# Altium PCB bottom_board_rev10_2.PcbDoc
Units mm, origin at the board's own origin, x right, y up, seen from the top; angles counter-clockwise.
Board outline 109 x 70 mm, 4 copper layers (Top Layer, +12V, -12V, Bottom Layer), stack 0.603 mm thick; 60 components, 46 nets, 194 pads, 56 vias.
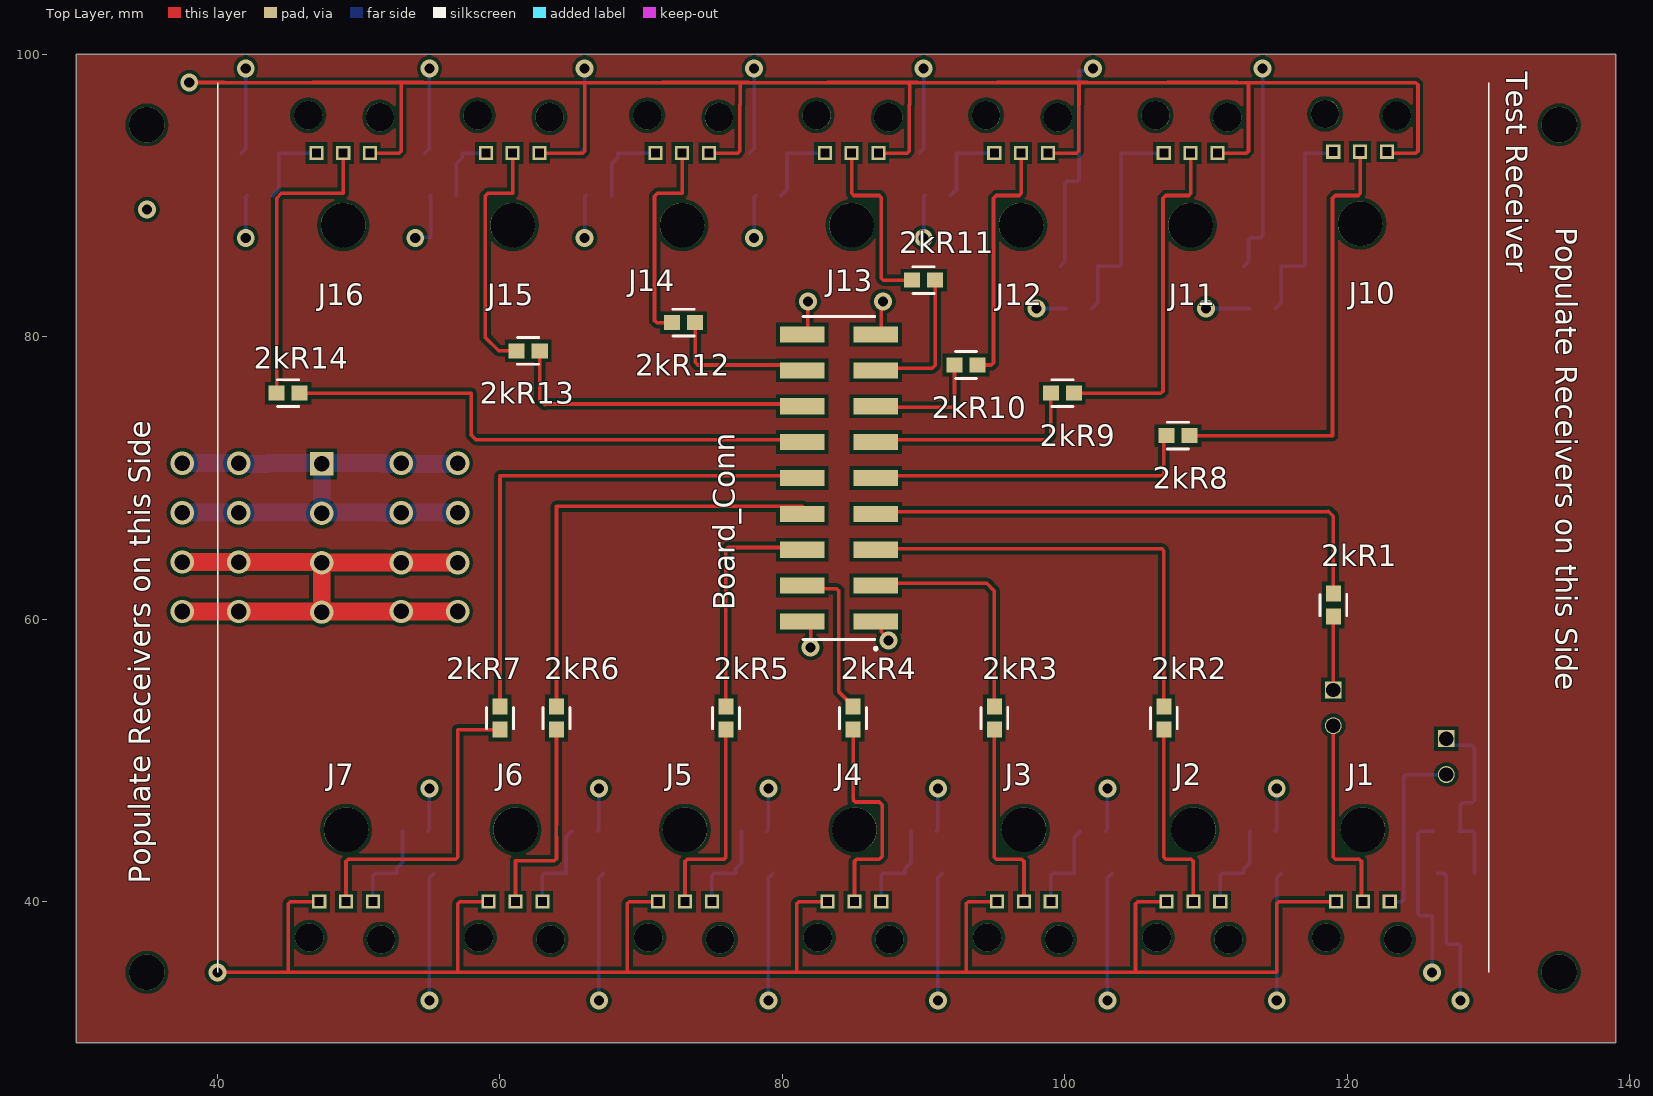
[diagram p0: Top Layer view]
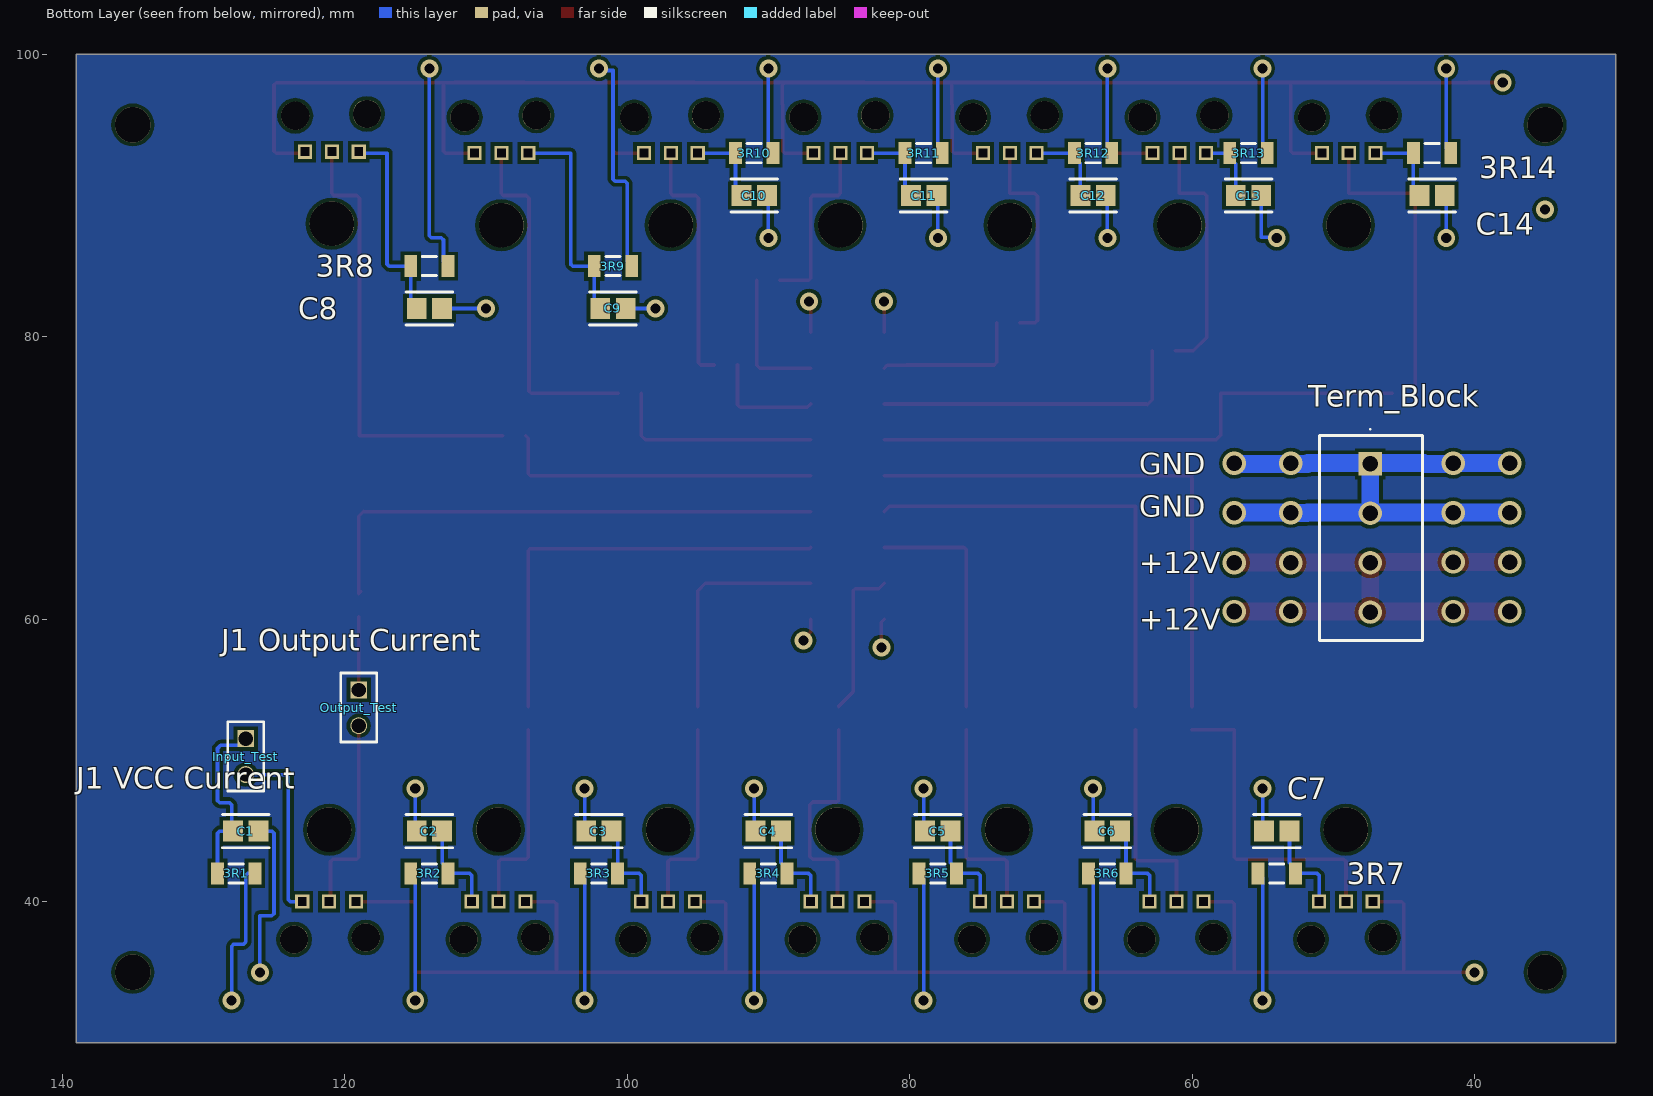
[diagram p1: Bottom Layer view, seen from below]
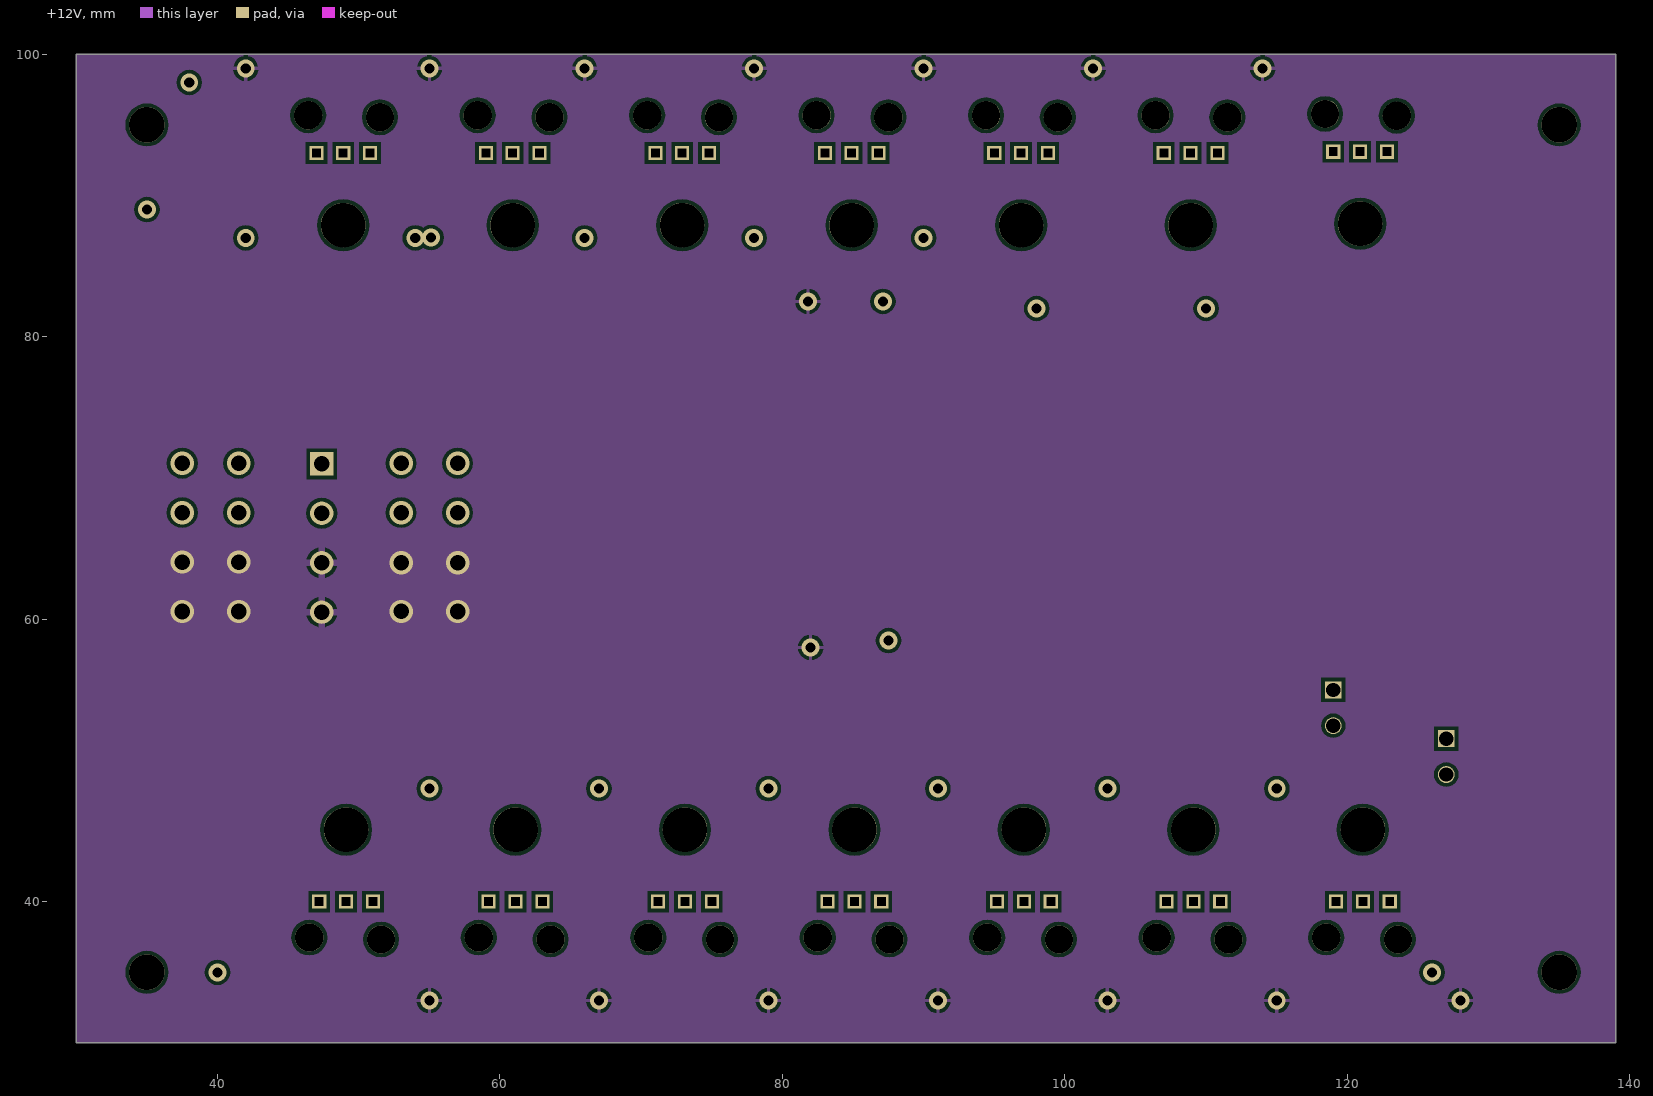
[diagram p2: +12V]
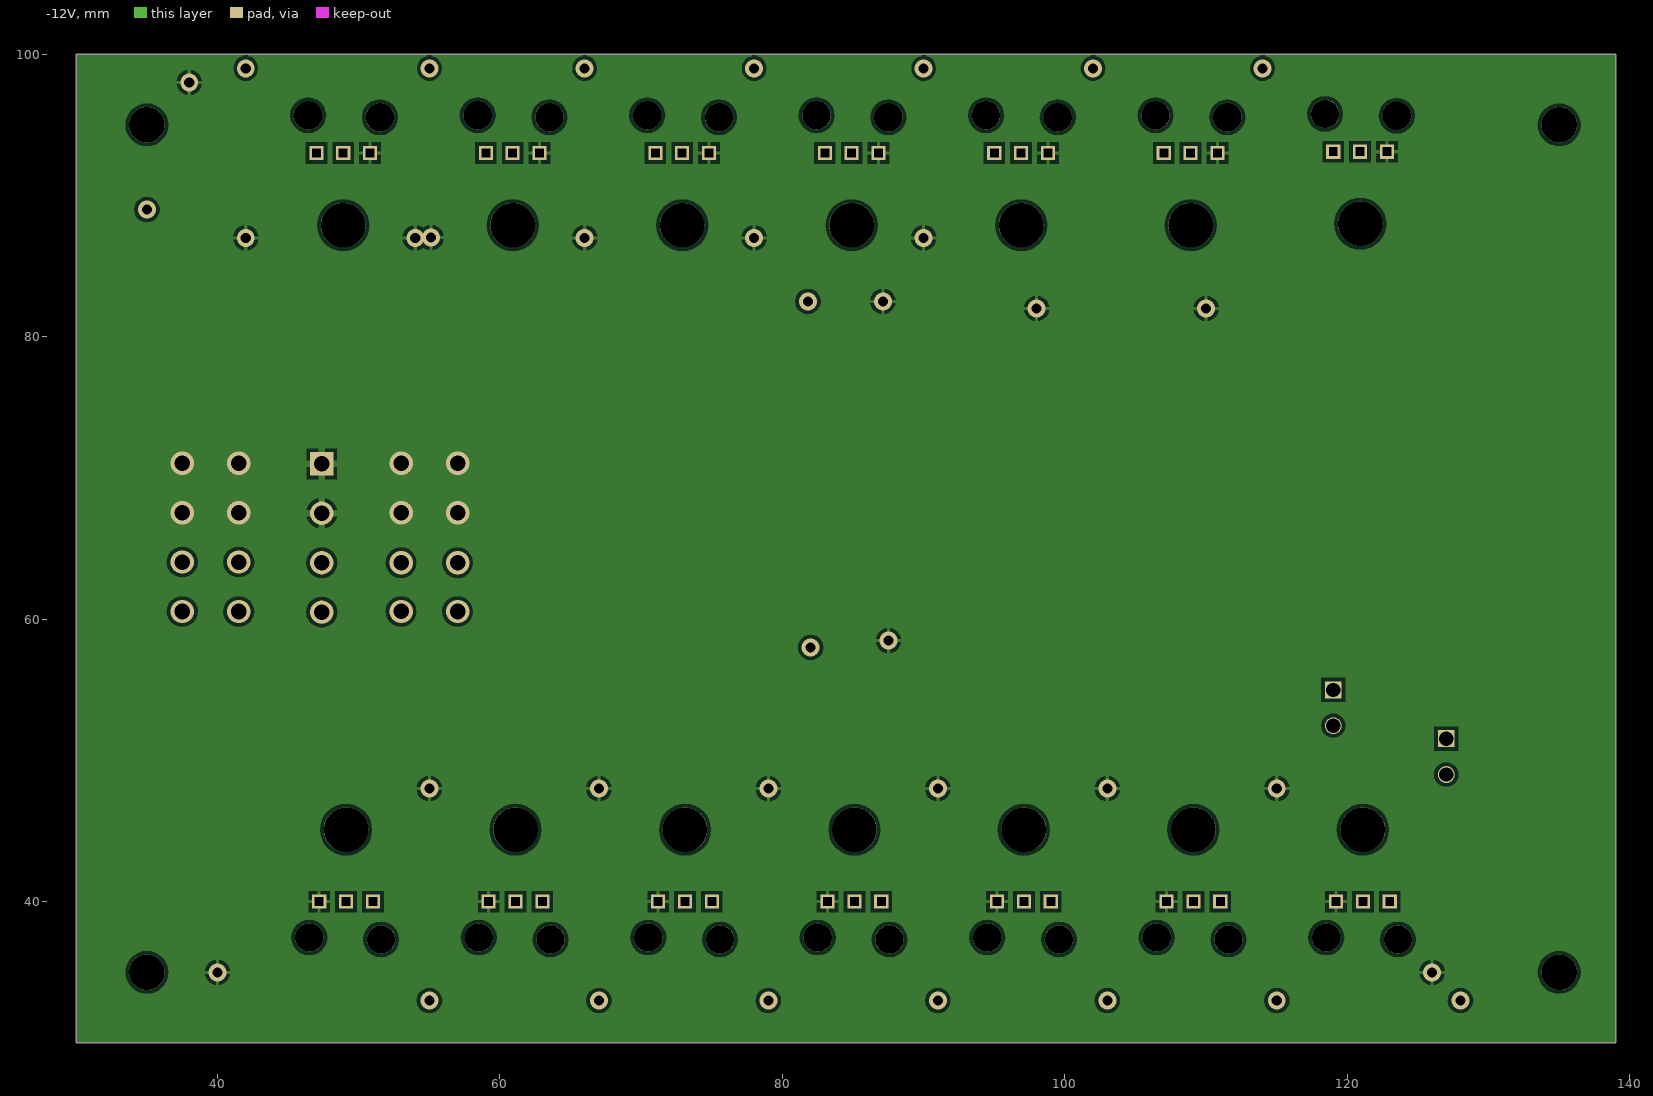
[diagram p3: -12V]
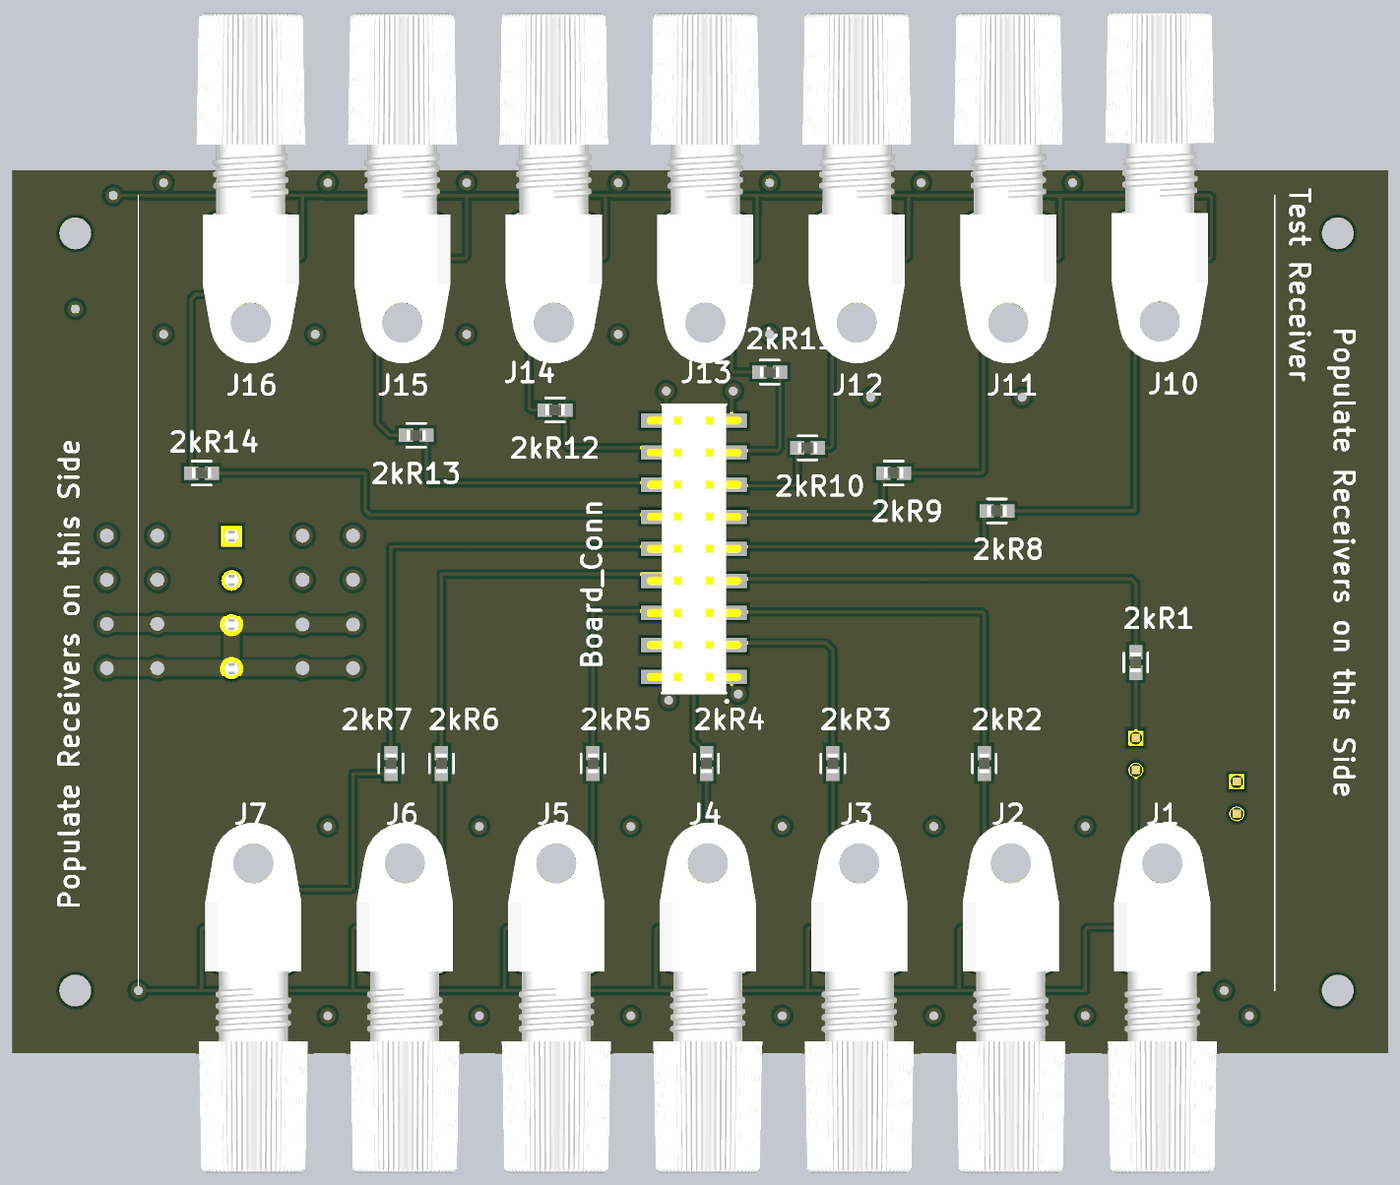
[diagram p4: 3D render of the assembled board from above, using the file's embedded part models]
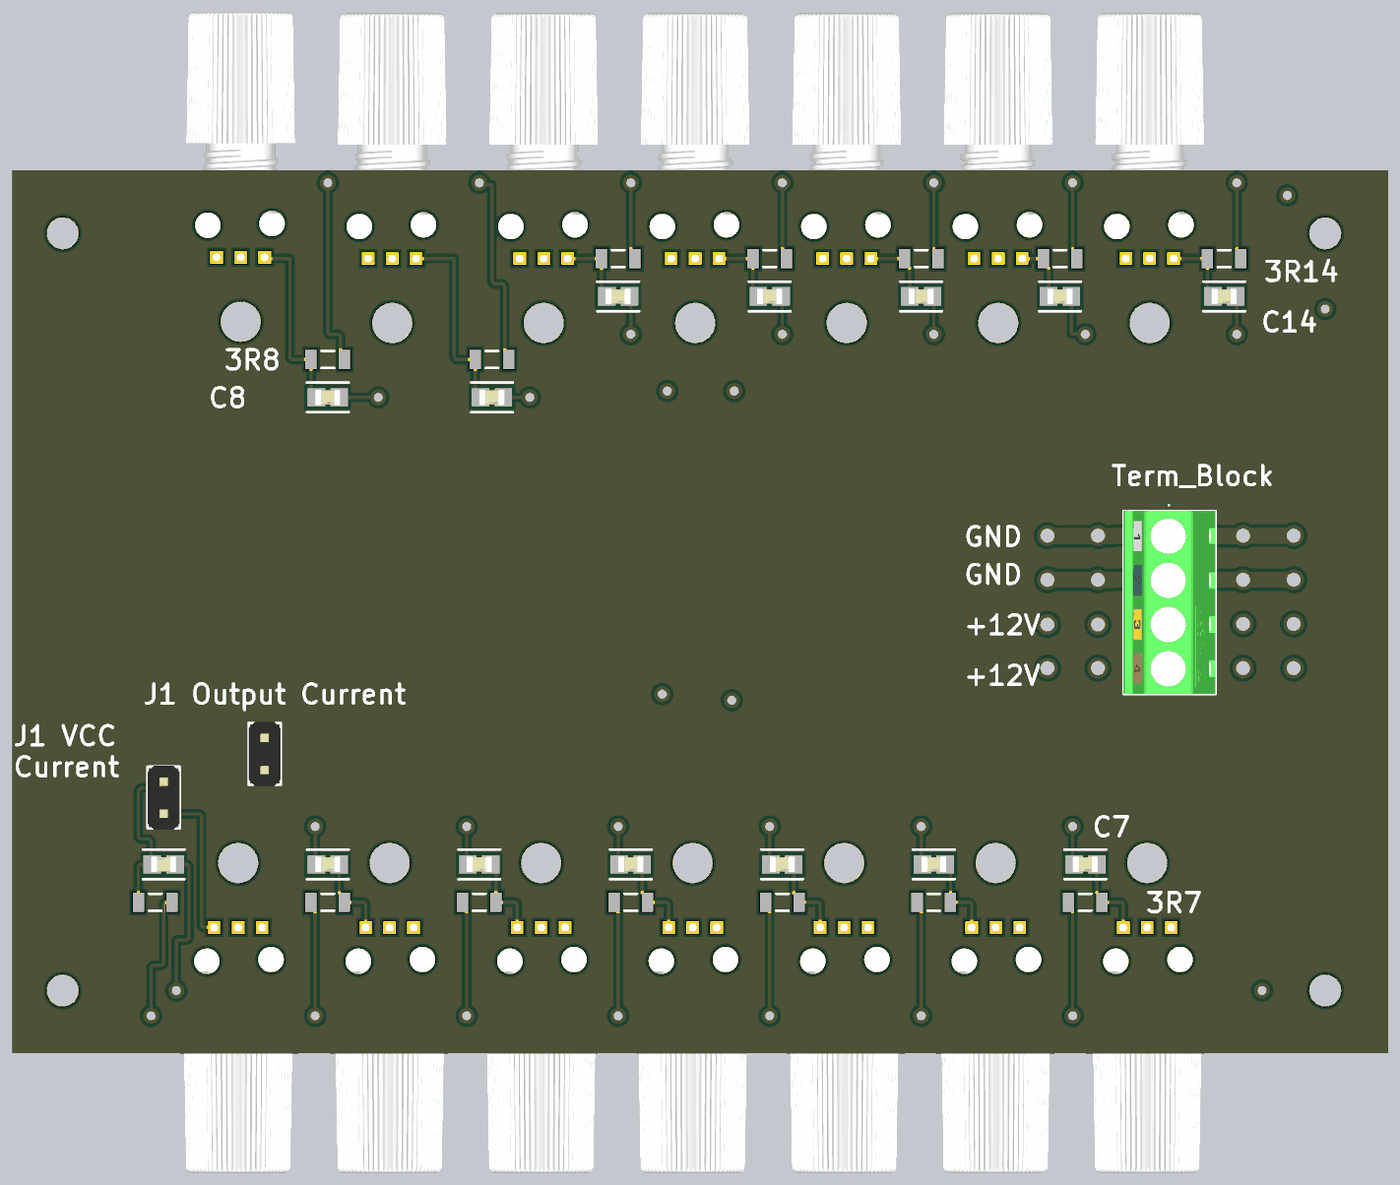
[diagram p5: 3D render of the assembled board from below, using the file's embedded part models]

## Layer stack, top to bottom
Top Solder: solder mask 0.0102, Solder Resist, Dk 3.5
Top Layer: signal copper 0.035
Dielectric 2: prepreg 0.0711, PP-006, Dk 4.1
+12V: signal copper 0.0356
Dielectric 1: dielectric 0.32, FR-4, Dk 4.8
-12V: signal copper 0.0356
Dielectric 3: prepreg 0.0711, PP-006, Dk 4.1
Bottom Layer: signal copper 0.035
Bottom Solder: solder mask 0.0102, Solder Resist, Dk 3.5

## Board outline
30,30 30,100 139,100 139,30

## Design rules (kind name [scope] priority, off if disabled: settings)
Clearance [All] p1: gap=0.254 ignorepadtopadclearanceinfootprint=FALSE except(0: Arc-Hole Track-Hole SMDPad-Hole THPad-Hole Via-Hole Fill-Hole Poly-Hole Region-Hole Text-Hole)
HoleSize [All] p1: absolutevalues=TRUE maxlimit=4 minlimit=0.025 maxpercent=80.000 minpercent=20.000
PolygonConnect [All] p1: connectstyle=Relief reliefconductorwidth=0.254 reliefentries=4 polygonreliefangle="90 Angle" airgapwidth=0.254
RoomDefinition bot_schem_rev10_1 [InComponentClass('bot_schem_rev10_1')] p1: confinementstyle=ConfineIn formatcopy=TRUE lockcomponents=FALSE outline 30,17 139,17 139,117 30,117
RoutingVias [All] p1: holewidth=0.711 width=1.27 viastyle="Through Hole" minholewidth=0.711 minwidth=1.27 maxholewidth=2 maxwidth=3
SolderMaskExpansion [All] p1: expansion=0.102 istentingtop=FALSE
Width [All] p1: maxlimit=2 minlimit=0.254 preferedwidth=0.254
29 further rules are at their usual default settings.

## Components (designator, comment, footprint, x,y, rotation, side; value= is the part's Value field where it differs from the comment)
2kR1 "CRCW06031K80FKEA" 2kOhm 119,61 r90 top
2kR2 "CRCW06031K80FKEA" 2kOhm 107,53 r90 top
2kR3 "CRCW06031K80FKEA" 2kOhm 95,53 r90 top
2kR4 "CRCW06031K80FKEA" 2kOhm 85,53 r90 top
2kR5 "CRCW06031K80FKEA" 2kOhm 76,53 r90 top
2kR6 "CRCW06031K80FKEA" 2kOhm 64,53 r90 top
2kR7 "CRCW06031K80FKEA" 2kOhm 60,53 r90 top
2kR8 "CRCW06031K80FKEA" 2kOhm 108,73 r180 top
2kR9 "CRCW06031K80FKEA" 2kOhm 99.815,76 r180 top
2kR10 "CRCW06031K80FKEA" 2kOhm 93,78 r180 top
2kR11 "CRCW06031K80FKEA" 2kOhm 90,84 r0 top
2kR12 "CRCW06031K80FKEA" 2kOhm 73,81 r0 top
2kR13 "CRCW06031K80FKEA" 2kOhm 62,79 r0 top
2kR14 "CRCW06031K80FKEA" 2kOhm 45,76 r0 top
3R1 "ERJ-2BQJR30X" "03 Ohm" 127.675,42 r0 bottom
3R2 "ERJ-2BQJR30X" "03 Ohm" 114,42 r180 bottom
3R3 "ERJ-2BQJR30X" "03 Ohm" 102,42 r180 bottom
3R4 "ERJ-2BQJR30X" "03 Ohm" 90,42 r180 bottom
3R5 "ERJ-2BQJR30X" "03 Ohm" 78,42 r180 bottom
3R6 "ERJ-2BQJR30X" "03 Ohm" 66,42 r180 bottom
3R7 "ERJ-2BQJR30X" "03 Ohm" 54,42 r180 bottom
3R8 "ERJ-2BQJR30X" "03 Ohm" 114,85 r0 bottom
3R9 "ERJ-2BQJR30X" "03 Ohm" 101,85 r0 bottom
3R10 "ERJ-2BQJR30X" "03 Ohm" 91,93 r0 bottom
3R11 "ERJ-2BQJR30X" "03 Ohm" 79,93 r0 bottom
3R12 "ERJ-2BQJR30X" "03 Ohm" 67,93 r0 bottom
3R13 "ERJ-2BQJR30X" "03 Ohm" 56,93 r0 bottom
3R14 "ERJ-2BQJR30X" "03 Ohm" 43,93 r0 bottom
Board_Conn "18-pin-header" "18 PIN HEADER" 84,70 r90 top
C1 "C0805C104K5RACTU" 100nF 127,45 r180 bottom
C2 "C0805C104K5RACTU" 100nF 114,45 r0 bottom
C3 "C0805C104K5RACTU" 100nF 102,45 r0 bottom
C4 "C0805C104K5RACTU" 100nF 90,45 r0 bottom
C5 "C0805C104K5RACTU" 100nF 78,45 r0 bottom
C6 "C0805C104K5RACTU" 100nF 66,45 r0 bottom
C7 "C0805C104K5RACTU" 100nF 54,45 r0 bottom
C8 "C0805C104K5RACTU" 100nF 114,82 r0 bottom
C9 "C0805C104K5RACTU" 100nF 101,82 r0 bottom
C10 "C0805C104K5RACTU" 100nF 91,90 r0 bottom
C11 "C0805C104K5RACTU" 100nF 79,90 r0 bottom
C12 "C0805C104K5RACTU" 100nF 67,90 r0 bottom
C13 "C0805C104K5RACTU" 100nF 56,90 r0 bottom
C14 "C0805C104K5RACTU" 100nF 43,90 r0 bottom
Input_Test "PRPC001DFAN-RC" PRPC001DFAN-RC 127,51.54 r270 bottom
J1 "IF-D95T" IF-D95 123,40 r180 top
J2 "IF-D95T" IF-D95 111,40 r180 top
J3 "IF-D95T" IF-D95 99,40 r180 top
J4 "IF-D95T" IF-D95 87,40 r180 top
J5 "IF-D95T" IF-D95 75,40 r180 top
J6 "IF-D95T" IF-D95 63,40 r180 top
J7 "IF-D95T" IF-D95 51,40 r180 top
J10 "IF-D95T" IF-D95 119,93.1 r0 top
J11 "IF-D95T" IF-D95 107,93 r0 top
J12 "IF-D95T" IF-D95 95,93 r0 top
J13 "IF-D95T" IF-D95 83,93 r0 top
J14 "IF-D95T" IF-D95 71,93 r0 top
J15 "IF-D95T" IF-D95 59,93 r0 top
J16 "IF-D95T" IF-D95 47,93 r0 top
Output_Test "PRPC001DFAN-RC" PRPC001DFAN-RC 119,55 r270 bottom
Term_Block "1050488" 1050488 47.382,71 r270 bottom

## Footprints (in the part's own frame and the unit in brackets; to place one, negate y for a bottom-side part, rotate by r counter-clockwise, add the part's x,y. Pads: shape width x height; smd on the part's side, far side on the other; paste and mask are expansions set on the pad)
2kOhm [mm]
  rect 1.135x1.062 smd paste+0 mask+0: 1(-0.815,0) 2(0.815,0)
  silkscreen extent -0.75,-0.95 0.75,0.95, body extent -1.88,-1.03 1.88,1.03, height 0.25
"03 Ohm" [mm]
  rect 0.9x1.55 smd: 1(-1.325,0) 2(1.325,0)
  silkscreen extent -0.5,-0.67 0.5,0.67, body extent -1.63,-0.82 1.62,0.82, height 0.7
"18 PIN HEADER" [mm]
  rect 1.14x3.175 smd: 01(-10.16,-2.602) 02(-10.16,2.603) 03(-7.62,-2.602) 04(-7.62,2.603) 05(-5.08,-2.602) 06(-5.08,2.603) 07(-2.54,-2.602) 08(-2.54,2.603) 09(0,-2.602) 10(0,2.603) 11(2.54,-2.602) 12(2.54,2.603) 13(5.08,-2.602) 14(5.08,2.603) 15(7.62,-2.602) 16(7.62,2.603) 17(10.16,-2.602) 18(10.16,2.603)
  silkscreen extent -12.18,-2.7 11.43,2.54, body extent -11.43,-3.75 11.43,3.75, height 21.98
100nF [mil]
  rect 55x58 smd paste+0 mask+0: 1(-35.46,0) 2(35.46,0)
  silkscreen extent -65,-46 65,46, body extent -39,-25 39,25, height 35
1050488 [mm]
  rect 1.65x1.65 hole 1.1: 1(0,0)
  round 1.65 hole 1.1: 2(3.5,0) 3(7,0) 4(10.5,0)
  silkscreen extent -2.5,-3.6 12.5,3.7, body extent -2,-3.6 12.5,3.7, height 8.73
IF-D95 [mm]
  rect 1x1 hole 0.6 square: 1(0,0) 2(1.9,0) 3(3.8,0)
  round 2 hole 2: 4(-0.58,2.675) 4(4.5,2.54)
  round 3.15 hole 3.15: 4(1.9,-5.1)
  body extent -2.42,-8.3 6.22,19.44, height 11.3
PRPC001DFAN-RC [mm]
  rect 1.2x1.2 hole 1: 1(0,0)
  round 1.2 hole 1: 2(2.54,0)
  silkscreen extent -1.2,-1.27 3.7,1.27, body extent -1.29,-1.27 3.79,1.27, height 10.17

## Part data
2kR1 2kR2 2kR3 2kR4 2kR5 2kR6 2kR7 2kR8 2kR9 2kR10 2kR11 2kR12 2kR13 2kR14: "Res Thick Film 0603 1.8K Ohm 1% 1/10W ±100ppm/°C Molded SMD Paper T/R", Case Code (Imperial)=0603, Case Code (Metric)=1608, Manufacturer=Vishay, Max Operating Temperature=155°C, Max Power Dissipation=100mW, Min Operating Temperature=-55°C, Package Quantity=5000, Resistance=1.8kR, Resistance Tolerance=1%, Resistor Type="Thick Film", Temperature Coefficient=100ppm/°C, Voltage Rating=75V, Case/Package=0603, Category="Chip SMD Resistors", ComponentLink1Description=https://datasheet.ciiva.com/11809/0900766b80d98afc-11809198.pdf?src-supplier=RSComponents, ComponentLink1URL=https://datasheet.ciiva.com/11809/0900766b80d98afc-11809198.pdf?src-supplier=RSComponents, ComponentLink2Description=https://datasheet.ciiva.com/2559/dcrcwe3-2559458.pdf?src-supplier=Digi-Key, ComponentLink2URL=https://datasheet.ciiva.com/2559/dcrcwe3-2559458.pdf?src-supplier=Digi-Key, ComponentLink3Description=https://datasheet.ciiva.com/2559/dcrcwe3-2559459.pdf?src-supplier=Digi-Key, ComponentLink3URL=https://datasheet.ciiva.com/2559/dcrcwe3-2559459.pdf?src-supplier=Digi-Key, ComponentLink4Description=https://datasheet.ciiva.com/2559/dcrcwe3-2559460.pdf?src-supplier=Digi-Key, ComponentLink4URL=https://datasheet.ciiva.com/2559/dcrcwe3-2559460.pdf?src-supplier=Digi-Key, ComponentLink5Description=https://datasheet.ciiva.com/3257/dcrcwe3-3257191.pdf?src-supplier=Avnet, ComponentLink5URL=https://datasheet.ciiva.com/3257/dcrcwe3-3257191.pdf?src-supplier=Avnet, ComponentLink6Description=https://datasheet.ciiva.com/5547/dcrcwe3-109170-5547689.pdf?src-supplier=Mouser, ComponentLink6URL=https://datasheet.ciiva.com/5547/dcrcwe3-109170-5547689.pdf?src-supplier=Mouser, ComponentLink7Description=https://datasheet.ciiva.com/26314/fld-crcw-e3-data-en-26314680.pdf?src-supplier=Distrelec, ComponentLink7URL=https://datasheet.ciiva.com/26314/fld-crcw-e3-data-en-26314680.pdf?src-supplier=Distrelec, ComponentLink8Description=https://datasheet.ciiva.com/22872/70201119-22872444.pdf?src-supplier=Allied+Electronics, ComponentLink8URL=https://datasheet.ciiva.com/22872/70201119-22872444.pdf?src-supplier=Allied+Electronics, ComponentLink9Description=https://datasheet.ciiva.com/7673/1533075-7673143.pdf?src-supplier=Element14, ComponentLink9URL=https://datasheet.ciiva.com/7673/1533075-7673143.pdf?src-supplier=Element14, Construction=Rectangular, Contact Plating=Tin, Depth=0.85mm, Features="Automotive AEC-Q200", Height=0.45mm, Lead Free="Lead Free", Length=1.55mm, Manufacturer Part Number=CRCW06031K80FKEA, Military Standard=Not, Number of Terminations=2, Packaging="Tape and Reel", Power Rating=100mW, Pricing 1="50=0.06500, 500=0.06000, 1000=0.05600, 2000=0.05200, 4000=0.04800 (USD)", Radiation Hardening=No, REACH SVHC=Unknown, RoHS=Yes, RoHS Compliant=Yes, Series=CRCW, Size Code=0603, Stock 1=7900, Supplier 1=RSComponents, Technology="THICK FILM", Termination=SMD/SMT, Tolerance=1%, Voltage Rating (DC)=75V, Weight=7.1E-05oz, Width=0.033inch
3R1 3R2 3R3 3R4 3R5 3R6 3R7 3R8 3R9 3R10 3R11 3R12 3R13 3R14: "RES 0.3 OHM 5% 1/6W 0402", Case Code (Imperial)=0402, Case Code (Metric)=1005, Manufacturer=Panasonic, Max Operating Temperature=125°C, Max Power Dissipation=167mW, Min Operating Temperature=-55°C, Resistance=300mR, Resistor Type="Thick Film", Supplier Part Number 1=P17347CT-ND, Temperature Coefficient=250ppm/°C, Tolerance=5%, Case/Package=0402, Category="Chip SMD Resistors", ComponentLink1Description=http://www.mouser.com/ds/2/315/AOA0000C295-1109214.pdf?src-supplier=Mouser, ComponentLink1URL=http://www.mouser.com/ds/2/315/AOA0000C295-1109214.pdf?src-supplier=Mouser, ComponentLink2Description=https://industrial.panasonic.com/cdbs/www-data/pdf/RDN0000/AOA0000C313.pdf?src-supplier=Digi-Key, ComponentLink2URL=https://industrial.panasonic.com/cdbs/www-data/pdf/RDN0000/AOA0000C313.pdf?src-supplier=Digi-Key, Features="Automotive AEC-Q200", Height=0.016inch, Length=0.039inch, Manufacturer Part Number=ERJ-2BQJR30X, Number of Terminations=2, Packaging="Tape and Reel", Pricing 1="1=0.21000, 10=0.17600, 25=0.12800, 50=0.09280, 100=0.06880, 250=0.05280, 500=0.04160, 1000=0.02880, 5000=0.02400 (USD)", RoHS=Yes, Stock 1=18282, Supplier 1=Digi-Key, Width=0.02inch
C1 C2 C3 C4 C5 C6 C7 C8 C9 C10 C11 C12 C13 C14: "Cap Ceramic 0.1uF 50V X7R 10% SMD 2.0 x 1.2 mm 125 C Paper T/R", Capacitance=100nF, Case Code (Imperial)=0805, Case Code (Metric)=2012, Dielectric=X7R, Dielectric Material=Ceramic, Manufacturer=KEMET, Max Operating Temperature=125°C, Min Operating Temperature=-55°C, Package Quantity=4000, Supplier Part Number 1=399-1170-1-ND, Tolerance=10%, Voltage=500V, Voltage Rating=50V, Case/Package=0805, Category="Ceramic Capacitors", ComponentLink1Description=https://datasheet.ciiva.com/28682/1851736-28682232.pdf?src-supplier=Element14, ComponentLink1URL=https://datasheet.ciiva.com/28682/1851736-28682232.pdf?src-supplier=Element14, ComponentLink2Description=https://datasheet.ciiva.com/14589/70095383-14589048.pdf?src-supplier=Allied+Electronics, ComponentLink2URL=https://datasheet.ciiva.com/14589/70095383-14589048.pdf?src-supplier=Allied+Electronics, ComponentLink3Description=https://datasheet.ciiva.com/32431/slceramic-chip-condensers-e-32431755.pdf?src-supplier=Distrelec, ComponentLink3URL=https://datasheet.ciiva.com/32431/slceramic-chip-condensers-e-32431755.pdf?src-supplier=Distrelec, ComponentLink4Description=https://datasheet.ciiva.com/18410/70095383-18410815.pdf?src-supplier=Allied+Electronics, ComponentLink4URL=https://datasheet.ciiva.com/18410/70095383-18410815.pdf?src-supplier=Allied+Electronics, Construction=Flat, Contact Plating=Tin,Matte, Depth=1.25mm, Height=0.9mm, Lead Pitch=0.75mm, Length=2mm, Manufacturer Part Number=C0805C104K5RACTU, Mount="Surface Mount,PCB", Number of Pins=2, Packaging="Tape and Reel", Pricing 1="1=0.15000, 10=0.11000, 50=0.06220, 100=0.05150, 500=0.03612, 1000=0.02991 (USD)", Radiation Hardening=No, REACH SVHC="No SVHC", RoHS=Yes, RoHS Compliant=Yes, Series=C0805C, Stock 1=2447786, Supplier 1=Digi-Key, Termination=SMD/SMT, Thickness=0.035inch, Voltage Rating (DC)=50V, Width=1.2mm
Input_Test Output_Test: "Conn Header Vert 2POS", Color=Black, Manufacturer=Sullins, Package Quantity=1, Supplier Part Number 1=S2211EC-01-ND, Category=Connectors, ComponentLink1Description=https://datasheet.ciiva.com/741/xrxczzzdxxn-rc-11636-b-741404.pdf?src-supplier=Digi-Key, ComponentLink1URL=https://datasheet.ciiva.com/741/xrxczzzdxxn-rc-11636-b-741404.pdf?src-supplier=Digi-Key, Connector Type="Male Pin", Contact Mating Length=0.318inch, Contact Plating=Gold, Manufacturer Part Number=PRPC001DFAN-RC, Mount="Through Hole", Number of Positions=2, Number of Rows=2, Packaging=Bulk, Pricing 1="1=0.09000, 10=0.08300, 25=0.06160, 50=0.05280, 100=0.05110, 250=0.04404, 500=0.04226 (USD)", RoHS=Yes, Row Spacing=0.1inch, Stock 1=5964, Supplier 1=Digi-Key, Termination=Solder
J1 J2 J3 J4 J5 J6 J7 J10 J11 J12 J13 J14 J15 J16: "DETECTOR PHOTOLOGIC TTL/CMOS", Manufacturer="Industrial Fiber Optics", Operating Supply Current=6mA, Package Quantity=50, Supplier Part Number 1=FB123-ND, Category="Fiber Optic Cables", ComponentLink1Description=https://datasheet.ciiva.com/2106/ifd95-2106550.pdf?src-supplier=Digi-Key, ComponentLink1URL=https://datasheet.ciiva.com/2106/ifd95-2106550.pdf?src-supplier=Digi-Key, Data Rate=125Kbps, Lead Free="Contains Lead", Manufacturer Part Number=IF-D95T, Rise Time=70ns, RoHS=No, Supplier 1=Digi-Key
Term_Block: "Connector", Manufacturer_Name="Phoenix Contact", Mouser Part Number=651-1050488, Datasheet Link=https://www.phoenixcontact.com/en-ae/products/printed-circuit-board-terminal-mkds-1-4-35-profinet-2-1050488#, Height=8.65mm, Manufacturer_Part_Number=1050488, Mouser Price/Stock=https://www.mouser.co.uk/ProductDetail/Phoenix-Contact/1050488?qs=GedFDFLaBXHuqlre%252BFuu6Q%3D%3D
Board_Conn: System=Connector

## Via types
v1: diameter 1.27, hole 0.711, Top Layer to Bottom Layer, tented both sides, 35 vias
v2: diameter 1.65/1.65/1.65/1.65 (per signal layer), hole 1.1, Top Layer to Bottom Layer, tented both sides, 16 vias
v3: diameter 2.5, hole 2.5, Top Layer to Bottom Layer, 4 vias
v4: diameter 1.27, hole 0.711, +12V to -12V, 1 vias

## Nets (pads, with @x,y where several pads share a name; then routed paths per layer and width w, separated by ;. In a path a pad name is that pad's centre, name@x,y a point inside that pad or via, vN(x,y) a via of type N, cw(c..) or ccw(c..) an arc to the next point about the centre after c; other vN are vias at no path point)
+12V: 3R1.1 3R2.1 3R3.1 3R4.1 3R5.1 3R6.1 3R7.1 3R8.1 3R9.1 3R10.1 3R11.1 3R12.1 3R13.1 3R14.1 Board_Conn.02 Board_Conn.18 Term_Block.3 Term_Block.4 | length 173.7
  Top Layer w0.254: Board_Conn.02@81.795,60 82,59.795 v1(82,58) ; Board_Conn.18@81.795,80.32 81.806,80.331 v1(81.806,82.5)
  Top Layer w1.27: v2(37.5,60.547) v2(41.5,60.547) 43.5,60.547 Term_Block.4@47.381,60.547 ; v2(37.5,64.047) v2(41.5,64.047) 47.335,64.047 Term_Block.3 ; Term_Block.3@47.382,64.047 Term_Block.4@47.382,60.547 ; Term_Block.3@47.405,64.024 51.976,64.024 ; 52,64 v2(53,64) v2(57,64) ; v2@53,60.547 52,60.547 Term_Block.4@47.382,60.547 ; v2@53,60.547 v2@57.057,60.547
  Bottom Layer w0.254: 3R14.1 41.998,93.323 v1(42,99) v1(42,99) ; Term_Block.3@47.382,64.047 Term_Block.3@47.405,64.024 ; 3R13.1 54.998,93.323 54.998,98.998 v1(55,99) ; v1(55,33) 55.002,33.002 55.002,41.677 3R7.1 ; 3R12.1 65.998,93.323 65.998,96.088 66,96.09 v1(66,99) ; v1(67,33) 67,41.675 3R6.1 ; 3R11.1 77.998,93.323 77.998,98.998 v1(78,99) ; v1(79,33) 79.002,33.002 79.002,41.677 3R5.1 ; 3R10.1 89.998,93.323 89.998,94.588 90,94.59 v1(90,99) ; v1(91,33) 91.002,33.002 91.002,41.677 3R4.1 ; 3R9.1 99.984,85.309 99.984,90.851 100.133,91 100.851,91 101,91.149 101,98.851 101.851,98.851 v1(102,99) ; v1(103,33) 103.002,33.002 103.002,41.677 3R3.1 ; 3R8.1 112.998,85.323 112.998,86.849 113.149,87 113.851,87 114,87.149 v1(114,99) v1@113.922,98.922 ; v1(115,33) 115.002,33.002 115.002,41.677 3R2.1 ; 3R1.1 126.851,42 127,41.851 127,37.149 127.149,37 127.851,37 128,36.851 v1(128,33) v1@127.998,33.002
  other v2: 53,60.547 57,60.547
+12V1: 3R8.2 C8.2 J10.1 | length 14.8
  Bottom Layer w0.254: C8.2 115.325,82.424 3R8.2 116.851,85 117,85.149 117,93 118.9,93 J10.1
+12V2: 3R9.2 C9.2 J11.1 | length 15.8
  Bottom Layer w0.254: C9.2 102.325,82.424 3R9.2 103.851,85 104,85.149 104,93 J11.1
+12V3: 3R10.2 C10.2 J12.1 | length 5.9
  Bottom Layer w0.254: C10.2 92.325,90.424 3R10.2 J12.1
+12V4: 3R11.2 C11.2 J13.1 | length 5.9
  Bottom Layer w0.254: C11.2 80.325,90.424 3R11.2 J13.1
+12V5: 3R12.2 C12.2 J14.1 | length 5.9
  Bottom Layer w0.254: C12.2 67.901,92.251 68.325,92.675 3R12.2 J14.1
+12V6: 3R13.2 C13.2 J15.1 | length 4.9
  Bottom Layer w0.254: C13.2 56.901,92.251 57.325,92.675 3R13.2 J15.1
+12V7: 3R14.2 C14.2 J16.1 | length 5.9
  Bottom Layer w0.254: C14.2 44.325,90.424 3R14.2 J16.1
+12V8: 3R1.2 C1.1 Input_Test.1 | length 13
  Bottom Layer w0.254: Input_Test.1 127.473,51.067 128.784,51.067 129,50.851 129,47.149 128.851,47 128.149,47 128,46.851 128,45.099 C1.1 128.851,45 129,44.851 3R1.2
+12V8_Test: Input_Test.2 J1.1 | length 12.8
  Bottom Layer w0.254: J1.1 123.851,40 124,40.149 124,48.851 124.149,49 Input_Test.2
+12V9: 3R2.2 C2.1 J2.1 | length 6.8
  Bottom Layer w0.254: J2.1 111,41.851 111.149,42 3R2.2 112.675,42.325 113.099,42.749 C2.1
+12V10: 3R3.2 C3.1 J3.1 | length 6.8
  Bottom Layer w0.254: J3.1 99,41.851 99.149,42 3R3.2 100.675,44.576 C3.1
+12V11: 3R4.2 C4.1 J4.1 | length 6.8
  Bottom Layer w0.254: J4.1 87,41.851 87.149,42 3R4.2 88.675,42.325 89.099,42.749 C4.1
+12V12: 3R5.2 C5.1 J5.1 | length 6.8
  Bottom Layer w0.254: J5.1 75,41.851 75.149,42 3R5.2 76.675,42.325 77.099,42.749 C5.1
+12V13: 3R6.2 C6.1 J6.1 | length 6.8
  Bottom Layer w0.254: J6.1 63,41.851 63.149,42 3R6.2 64.675,44.576 C6.1
+12V14: 3R7.2 C7.1 J7.1 | length 6.8
  Bottom Layer w0.254: J7.1 51,41.851 51.149,42 3R7.2 52.675,42.325 53.099,42.749 C7.1
DIG12_TestVoltage: J1.2 Output_Test.2 | length 14.3
  Top Layer w0.254: Output_Test.2 119,43.149 119.149,43 120.851,43 121,42.851 121,40.1 J1.2
DIG_1: 2kR4.1 J4.2 | length 15.8
  Top Layer w0.254: 2kR4.1 85,47.205 85.149,47.056 86.851,47.056 87.056,46.851 87.056,43.205 86.851,43 85.249,43 85.1,42.851 J4.2
DIG_2: 2kR5.1 J5.2 | length 14.9
  Top Layer w0.254: J5.2 73.1,42.851 73.249,43 75.563,43 75.579,43.016 75.867,43.016 76,43.149 76,44.563 75.984,44.579 75.984,52.169 2kR5.1
DIG_3: 2kR6.1 J6.2 | length 15
  Top Layer w0.254: J6.2 61.1,42.9 63.851,42.9 64,43.049 64,44.563 63.984,44.579 63.984,45.421 64,45.437 2kR6.1
DIG_4: 2kR7.1 J7.2 | length 22.9
  Top Layer w0.254: J7.2 49.1,42.851 49.249,43 56.851,43 57,43.149 57,52.185 2kR7.1
DIG_5: 2kR14.1 J16.2 | length 21.5
  Top Layer w0.254: 2kR14.1 44.185,89.815 44.518,90.149 48.9,90.149 J16.2
DIG_6: 2kR13.1 J15.2 | length 17.5
  Top Layer w0.254: J15.2 60.9,90.149 59.149,90.149 58.944,89.944 58.944,79.962 59.906,79 2kR13.1
DIG_7: 2kR12.1 J14.2 | length 15
  Top Layer w0.254: 2kR12.1 71.093,81 70.944,81.149 70.944,89.944 71.149,90.149 72.9,90.149 J14.2
DIG_8: 2kR11.1 J13.2 | length 13
  Top Layer w0.254: J13.2 84.9,90.149 85.049,90 86.851,90 87,89.851 87,84.149 87.149,84 2kR11.1
DIG_9: 2kR10.1 J12.2 | length 17.8
  Top Layer w0.254: 2kR10.1 94.795,78 94.944,78.149 94.944,89.795 95.149,90 96.751,90 96.9,90.149 J12.2
DIG_10: 2kR9.1 J11.2 | length 25
  Top Layer w0.254: 2kR9.1 106.795,76 106.944,76.149 106.944,89.795 107.149,90 108.751,90 108.9,90.149 J11.2
DIG_11: 2kR8.1 J10.2 | length 32
  Top Layer w0.254: 2kR8.1 118.944,73 118.944,89.795 119.149,90 120.751,90 120.9,90.149 J10.2
DIG_12: 2kR1.1 Output_Test.1 | length 5.2
  Top Layer w0.254: Output_Test.1 2kR1.1
DIG_13: 2kR2.1 J2.2 | length 14.1
  Top Layer w0.254: 2kR2.1 107,43.149 107.149,43 108.951,43 109.1,42.851 J2.2
DIG_14: 2kR3.1 J3.2 | length 14.1
  Top Layer w0.254: 2kR3.1 95,43.149 95.149,43 96.951,43 97.1,42.851 J3.2
GND: Board_Conn.01 Board_Conn.17 C1.2 C2.2 C3.2 C4.2 C5.2 C6.2 C7.2 C8.1 C9.1 C10.1 C11.1 C12.1 C13.1 C14.1 J1.3 J2.3 J3.3 J4.3 J5.3 J6.3 J7.3 J10.3 J11.3 J12.3 J13.3 J14.3 J15.3 J16.3 Term_Block.1 Term_Block.2 | length 363.1
  Top Layer w0.254: v1(38,98) 40.437,98 40.453,97.984 46.719,97.984 46.735,98 53,98 ; v1(40,35) 45,35 ; J7.3 45.149,40 45,39.851 45,35 ; J16.3 52.851,93 53,93.149 53,98 ; J6.3 57.149,40 57,39.851 57,35 ; J15.3 65.851,93 66,93.149 66,97.984 ; J5.3 69.149,40 69,39.851 69,35 ; J14.3 76.835,93 76.984,93.149 76.984,96.421 77,96.437 77,98 ; J4.3 81.149,40 81,39.851 81,35 ; J13.3 88.835,93 88.984,93.149 88.984,96.421 89,96.437 89,97.851 88.851,98 ; Board_Conn.01@87,60 87,59.103 87.509,58.593 v1(87.509,58.484) v1@87.593,58.568 ; Board_Conn.17@87,80.32 87,82.559 v1@87.111,82.67 ; J3.3 93.149,40 93,39.851 93,35 ; J12.3 100.835,93 100.984,93.149 100.984,96.421 101,96.437 101,97.851 100.851,98 ; J2.3 105.149,40 105,39.851 105,35 ; J11.3 112.851,93 113,93.149 113,97.984 ; J1.3 115.149,40 115,39.851 115,35 105,35 ; J10.3 122.9,93 124.851,93 125,93.149 125,97.835 124.851,97.984 113,97.984 ; 45,35 57,35 ; 53,98 54.563,98 54.579,97.984 66,97.984 ; 57,35 69,35 ; 66,97.984 71.492,97.984 71.508,98 77,98 ; 69,35 81,35 ; 77,98 77.563,98 77.579,97.984 83.207,97.984 83.223,98 88.851,98 ; 81,35 93,35 ; 88.851,98 89.563,98 89.579,97.984 95.207,97.984 95.223,98 100.851,98 ; 93,35 105,35 ; 100.851,98 101.563,98 101.579,97.984 107.282,97.984 107.298,98 112.202,98 112.218,97.984 113,97.984
  Bottom Layer w0.254: v1(42,87) 42,89.901 C14.1 ; v1(54,87) 54.032,87.032 55.099,87.032 C13.1 C13.1@55.023,89.924 ; C7.2 55,45.099 v1(55,48) ; v1(66,87) 66,89.901 C12.1 ; C6.2 67,45.099 v1(67,48) ; v1(78,87) 78,89.901 C11.1 ; C5.2 79,45.099 v1(79,48) ; v1(90,87) 90,89.901 C10.1 ; C4.2 91,45.099 v1(91,48) ; v1(98,82) C9.1 ; C3.2 103,45.099 v1(103,48) ; v1(110,82) C8.1 ; C2.2 115,45.099 v1(115,48) ; v1(126,35) 126,39 125.149,39 125,39.149 125,44.851 125.149,45 C1.2
  Bottom Layer w1.27: v2(37.5,67.547) v2(41.5,67.547) 47.335,67.547 Term_Block.2 ; v2(37.5,71.047) v2(41.5,71.047) ; v2@41.5,71 43.547,71 ; 43.594,71.047 47.381,71.047 Term_Block.2@47.382,67.547 ; Term_Block.2@47.382,67.547 51.829,67.547 ; Term_Block.1@47.382,71.047 51.78,71.047 ; 51.827,71 53,71 v2@57,71 ; 51.847,67.529 v2@53,67.529 ; v2(53,67.547) v2@57.031,67.547
  other v1: 87.111,82.5
  other v2: 57,67.547 53,71.047 57,71.047
  other v4: 55.119,87.013
RED_DIG_1: 2kR4.2 Board_Conn.04 | length 11
  Top Layer w0.254: Board_Conn.04@81.795,62.54 82.186,62.149 83.851,62.149 84,62 84,54.852 85,53.852 2kR4.2
RED_DIG_2: 2kR5.2 Board_Conn.06 | length 17
  Top Layer w0.254: 2kR5.2 76,64.931 76.149,65.08 Board_Conn.06@81.795,65.08
RED_DIG_3: 2kR6.2 Board_Conn.08 | length 32.1
  Top Layer w0.254: 2kR6.2 64,68 81.415,68 Board_Conn.08@81.795,67.62
RED_DIG_4: 2kR7.2 Board_Conn.10 | length 38
  Top Layer w0.254: 2kR7.2 60,69.987 ; 60,70.16 81.397,70.16 Board_Conn.10@81.795,70.16
RED_DIG_5: 2kR14.2 Board_Conn.12 | length 39.1
  Top Layer w0.254: 2kR14.2 57.959,76 57.959,73.041 58.3,72.7 Board_Conn.12@81.795,72.7
RED_DIG_6: 2kR13.2 Board_Conn.14 | length 22.6
  Top Layer w0.254: 2kR13.2 62.815,75.534 63.175,75.175 63.24,75.24 Board_Conn.14@81.795,75.24
RED_DIG_7: 2kR12.2 Board_Conn.16 | length 11
  Top Layer w0.254: 2kR12.2 73.815,78.185 74,78 80.186,78 80.203,77.983 81.592,77.983 Board_Conn.16@81.795,77.78
RED_DIG_8: 2kR11.2 Board_Conn.15 | length 9.9
  Top Layer w0.254: Board_Conn.15@87,77.78 90.607,77.78 90.815,77.989 2kR11.2
RED_DIG_9: 2kR10.2 Board_Conn.13 | length 8.2
  Top Layer w0.254: Board_Conn.13@87,75.24 87.24,75 92,75 92.185,75.185 2kR10.2
RED_DIG_10: 2kR9.2 Board_Conn.11 | length 15.1
  Top Layer w0.254: Board_Conn.11@87,72.7 98.7,72.7 99,73 2kR9.2
RED_DIG_11: 2kR8.2 Board_Conn.09 | length 22.8
  Top Layer w0.254: Board_Conn.09@87,70.16 106.84,70.16 106.989,70.309 106.989,72.804 2kR8.2
RED_DIG_12: 2kR1.2 Board_Conn.07 | length 37.8
  Top Layer w0.254: Board_Conn.07@87,67.62 118.62,67.62 118.641,67.641 119,67.282 2kR1.2 2kR1.2@118.851,61.964
RED_DIG_13: 2kR2.2 Board_Conn.05 | length 31.1
  Top Layer w0.254: Board_Conn.05@87,65.08 87.08,65 106.851,65 107,64.851 2kR2.2
RED_DIG_14: 2kR3.2 Board_Conn.03 | length 16.4
  Top Layer w0.254: Board_Conn.03@87,62.54 94.46,62.54 95,62 2kR3.2
pads on no net: J1.4 J2.4 J3.4 J4.4 J5.4 J6.4 J7.4 J10.4 J11.4 J12.4 J13.4 J14.4 J15.4 J16.4
copper on no net:
  other v1: 35,89
  other v3: 35,35 135,35 35,95 135,95

## Polygon pours and split planes (outlines as drawn)
GND on -12V "-12V" (solid, pour order 0): 30,30 30,100 139,100 139,30
+12V on +12V "+12V" (solid, pour order 1): 30,30 30,100 139,100 139,30
no net on Top Layer "Top" (solid, pour order 2): 30,30 30,100 139,100 139,30
no net on Bottom Layer "Bottom" (solid, pour order 3): 30,30 30,100 139,100 139,30

## Silkscreen, mask and mechanical layers (free items; w line width, h text height)
Top Overlay:
  lines w0.1: 40,35 40,98 ; 130,35 130,98
  text "Test Receiver" at 131.254,98.746 h1.52 r270
  text "Populate Receivers on this Side" at 134.762,87.746 h1.52 r270
  text "Populate Receivers on this Side" at 35.238,41.254 h1.52 r90
Bottom Overlay:
  text "GND" at 63.746,70.254 h1.5
  text "GND" at 63.746,67.254 h1.5
  text "+12V" at 63.746,63.254 h1.5
  text "+12V" at 63.746,59.254 h1.5
  text "J1 Output Current" at 128.746,57.762 h1.52
  text "J1 VCC Current" at 139,48 h1.52
Mechanical 1:
  lines w0: 30,30 139,30 ; 30,30 30,100 ; 30,30 139,30 ; 30,30 30,100 ; 30,100 139,100 ; 30,100 139,100 ; 139,30 139,100 ; 139,30 139,100
Mechanical 0:
  the board outline again, w0